# Altium PCB PCB.PcbDoc (part 2 of 2)
Units mil, origin at the board's own origin, x right, y up, seen from the top; angles counter-clockwise.
Board outline 2657.48 x 2755.91 mil, 2 copper layers (Top Layer, Bottom Layer), stack 62.2 mil thick; 84 components, 72 nets, 315 pads, 105 vias.
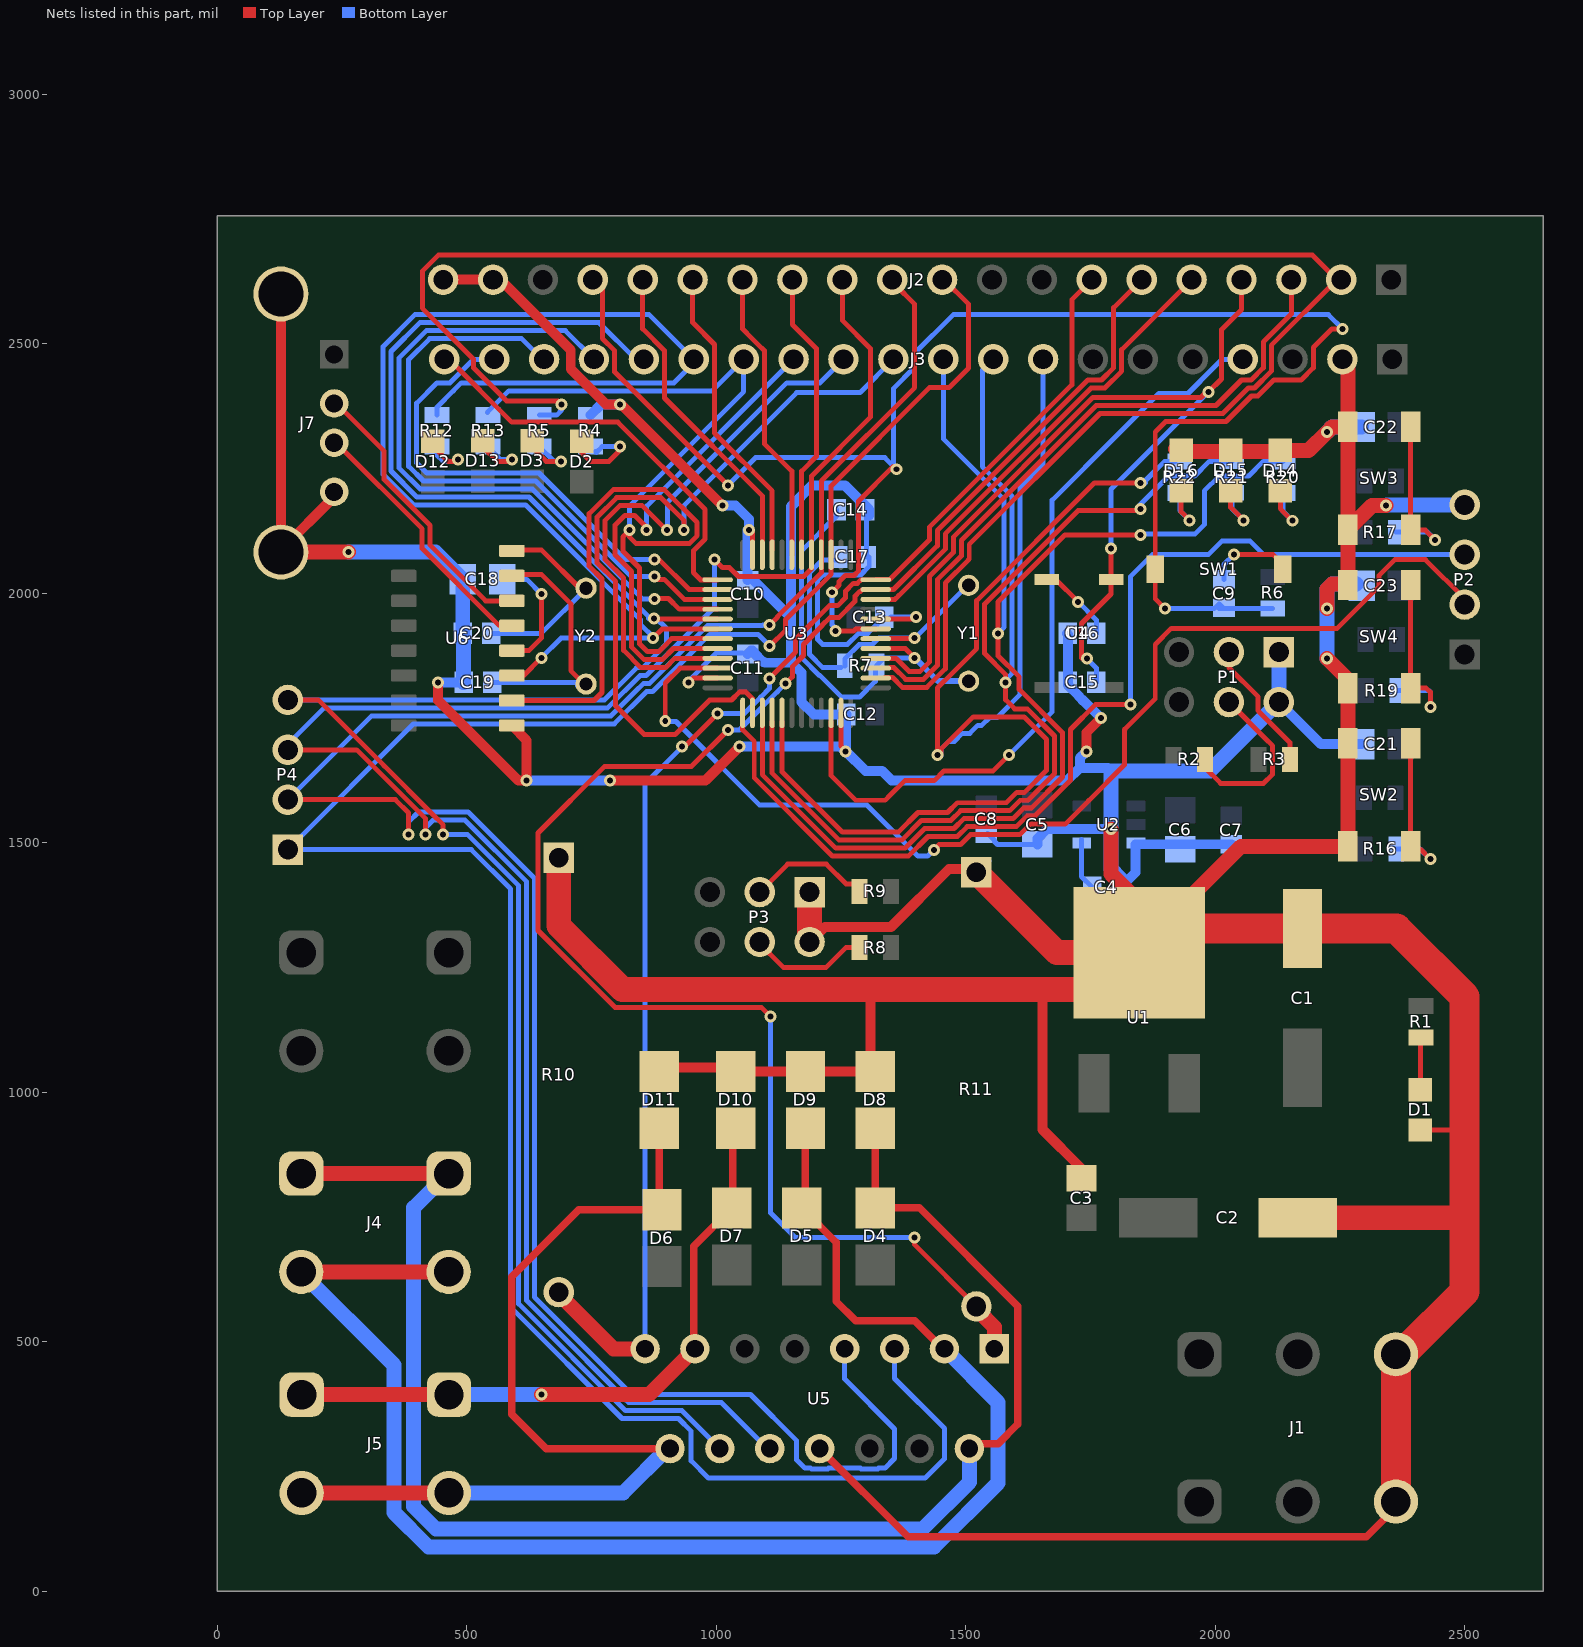
[diagram p2: the nets of this part, all layers, seen from the top]

## Via types
v1: diameter 24, hole 12, Top Layer to Bottom Layer, 104 vias
v2: diameter 50, hole 24, Top Layer to Bottom Layer, 1 vias

## Nets (pads, with @x,y where several pads share a name; then routed paths per layer and width w, separated by ;. In a path a pad name is that pad's centre, name@x,y a point inside that pad or via, vN(x,y) a via of type N, cw(c..) or ccw(c..) an arc to the next point about the centre after c; other vN are vias at no path point) (continued)
GND: C1.1 C2.1 C3.1 C4.1 C5.1 C6.1 C7.1 C8.1 C10.1 C11.1 C12.1 C13.1 C14.2 C15.2 C16.2 C17.2 C18.2 C19.2 C20.2 C21.1 C22.1 C23.1 D1.2 D8.2 D9.2 D10.2 D11.2 D14.2 D15.2 D16.2 J1.3 J2.19 J2.20 J3.2 J7.4 J7.5 J7.6 P1.1 P1.2 P2.4 P3.1 P3.2 R4.2 R10.1 R11.1 SW2.3 SW2.4 SW3.3 SW3.4 SW4.3 SW4.4 U1.4 U2.3 U3.8 U3.23 U3.35 U3.47 U5.8 U6.1 | length 16803
  Top Layer w10: J7.5@127.8,2599.24 J7.5@156.5,2627.95 ; v1(944.88,1820.87) 953.74,1829.72 U3.35@1002.95,1829.72 ; v1(1065.52,2125.98) 1072.83,2125.98 U3.23@1072.83,2076.77 ; U3.47@1250,1759.84 1250,1692.91 v1@1259.84,1683.07 ; U3.8@1319.88,1947.83 1396.65,1947.83 v1@1397.64,1948.82 ; D1.2@2411.38,923.85 2500,923.85 2508.5,923.85 2509.84,925.2
  Top Layer w15: U5.8@1207.48,285.43 1384.65,108.27 2303.15,108.27 2352.36,157.48 J1.3@2352.36,177.17
  Top Layer w20: J7.5@127.8,2599.24 127.8,2086.29 234.49,2192.98 J7.4@234.49,2202.79 J7.4@234.49,2207.16 ; v1(442.91,1820.87) 442.91,1784.45 603.35,1624.02 v1(620.08,1624.02) 620.08,1704.92 U6.1@590.55,1734.45 ; J2.20@452.76,2627.95 J2.19@552.76,2627.95 567.51,2627.95 680.61,2514.86 708.59,2486.88 708.59,2449.08 779.41,2378.26 v1(807.09,2378.26) 809.31,2378.26 v1(1012.37,2175.2) ; v1(786.81,1624.61) 979.05,1624.61 v1(1046.55,1692.11) ; D11.2@899.1,1049.21 D10.2@1032,1049.21 ; D10.2@1039.06,1041.34 1169.29,1041.34 1171.26,1043.31 1173.23,1041.34 D9.2@1178.98,1041.34 D8.2@1318.9,1041.34 ; P3.2@1187.2,1314.22 P3.2@1187.2,1300.65 1217.71,1331.16 1350.85,1331.16 1466.54,1446.85 R11.1@1509.92,1446.85 ; D8.2@1309.06,1061.02 1309.06,1200.79 ; 1653.54,1205.71 1653.54,925.2 C3.1@1732.28,846.46 ; v1(1742.08,1682.52) 1742.08,1720.43 v1(1771.09,1749.44)
  Top Layer w30: J7.6@127.8,2081.92 v1(263.03,2081.92) ; v1(1791.34,1526.91) 1791.34,1437.01 1847.68,1380.67 U1.4@1847.68,1279.39 ; U1.4@1887.92,1328.58 2051.63,1492.28 SW2.4@2265.75,1492.28 SW2.3@2265.75,1698.98 SW4.4@2265.75,1809.37 2265.75,1827.17 v1(2224.41,1868.5) ; D16.2@1920.87,2288.9 D16.2@1923.93,2285.84 ; D16.2@1927.81,2283.46 D15.2@2017.72,2283.46 ; D15.2@2027.56,2283.46 2125.51,2283.46 D14.2@2126.65,2284.6 ; D14.2@2130.51,2285.7 2187.27,2285.7 v1(2224.41,2322.83) 2234.25,2332.68 SW3.3@2253.94,2332.68 ; v1(2224.41,1968.61) 2224.41,2007.87 2234.25,2017.72 SW4.3@2265.75,2017.72 ; J3.2@2253.94,2480.32 2265.75,2468.5 SW3.4@2265.75,2126.46 ; SW4.3@2265.76,2016.07 SW3.4@2265.76,2126.46 ; v1(2342.52,2175.2) 2314.5,2175.2 SW3.4@2265.76,2126.46
  Top Layer w50: R10.1@684.55,1469.44 684.55,1333.17 812.01,1205.71 1653.54,1205.71 U1.4@1756.41,1205.71 ; P3.2@1187.2,1314.22 P3.1@1187.2,1400.65 ; R11.1@1521.41,1440.71 1682.73,1279.39 U1.4@1847.68,1279.39 ; C2.1@2165.35,748.03 2490.16,748.03 2500,757.87
  Top Layer w60: U1.4@1888.76,1327.74 C1.1@2175.2,1327.74 2363.21,1327.74 2500,1190.94 2500,923.85 2500,757.87 2500,600.39 J1.3@2376.97,477.36 ; J1.3@2362.2,179.13 J1.3@2362.2,472.44
  Bottom Layer w10: v1(944.88,1820.87) 944.88,1824.5 1000.3,1879.92 C11.1@1053.15,1879.92 ; C14.2@1298.23,2166.95 1301.17,2164.01 C17.2@1301.17,2072.24 ; C17.2@1306.77,2072.24 1306.77,2053.43 1289.28,2035.93 1213.68,2035.93 1203.26,2025.51 1203.26,1906.97 1213.57,1896.65 1262.97,1896.65 1285.43,1919.12 1303.98,1919.12 C13.1@1336.63,1951.77 ; C13.1@1347.28,1948.82 1350.23,1951.77 v1(1400.17,1951.77) ; R11.1@1543.88,1463.26 R11.1@1546.83,1463.26 ; C8.1@1544.13,1518.17 1557.83,1504.47 1557.83,1501.92 1563.69,1496.06 C5.1@1643.71,1496.06
  Bottom Layer w20: v1(442.91,1820.87) C19.2@494.09,1820.87 ; v1(620.08,1624.02) 620.67,1624.61 v1(786.81,1624.61) ; R4.2@748.03,2356.46 769.84,2378.26 v1(807.09,2378.26) ; v1(1012.37,2175.2) 1038.52,2175.2 1065.52,2148.2 v1(1065.52,2125.98) 1062.99,2125.98 C10.1@1062.99,2025.59 ; v1(1046.55,1692.11) 1249.65,1692.11 v1(1259.04,1682.72) 1259.84,1683.53 C12.1@1259.84,1751.97 ; C11.1@1062.99,1877.95 1070.05,1885.01 1072.83,1885.01 1075.28,1882.56 1075.28,1880.45 1094.03,1861.7 1096.14,1861.7 1097.59,1860.26 1146.31,1860.26 1148.85,1862.79 1171.26,1840.38 ; C10.1@1072.83,2027.56 1150.26,1950.13 ; 1150.26,1864.21 1150.26,1950.13 ; 1171.26,1838.38 1171.26,1781.17 1195.85,1756.57 C12.1@1260.84,1756.57 ; v1@1259.84,1683.07 1299.21,1643.7 1332.15,1643.7 1351.84,1624.02 1703.21,1624.02 1728.68,1649.49 ; C14.2@1306.77,2155.51 1306.77,2166.95 1257.84,2215.88 1192.26,2215.88 1150.26,2173.88 1150.26,1950.13 ; C5.1@1643.71,1496.06 1643.71,1507.59 1663.02,1526.91 v1(1791.34,1526.91) ; C16.2@1702.76,1919.29 1704.72,1917.32 C15.2@1704.72,1820.87 1704.72,1815.81 1727.11,1793.42 1727.11,1792.59 1736.48,1783.21 1737.32,1783.21 v1(1771.09,1749.44) ; v1(1742.08,1682.52) 1728.68,1669.13 1728.68,1649.49 ; 1791.34,1643.7 1791.34,1643.9 1785.74,1649.49 1728.68,1649.49 ; C4.1@1802.35,1418.49 C4.1@1810.75,1410.09 ; C4.1@1819.42,1418.77 1840.55,1439.89 1840.55,1496.06 1841.02,1496.53 C7.1@2032.6,1496.53 ; P1.2@2127.56,1781.5 2212.01,1697.05 C21.1@2292.98,1697.05
  Bottom Layer w30: v1(263.03,2081.92) 437.76,2081.92 C18.2@492.13,2027.56 ; C20.2@492.13,1919.29 C18.2@492.13,2017.72 ; C19.2@494.09,1820.87 C20.2@494.09,1909.45 ; C4.1@1811.02,1427.17 1791.34,1446.85 v1(1791.34,1526.91) 1791.34,1643.7 1989.76,1643.7 P1.2@2127.56,1781.5 2127.56,1868.5 P1.1@2125.98,1870.08 ; v1(2224.41,1868.5) v1(2224.41,1968.61) 2224.41,2007.87 2234.25,2017.72 C23.1@2283.46,2017.72 ; v1(2224.41,2322.83) 2234.25,2332.68 C22.1@2293.31,2332.68 ; v1(2342.52,2175.2) 2344.09,2176.77 P2.4@2500,2176.77
ISEN_A: J2.6 R11.2 U3.11 U5.1 | length 3513.2
  Top Layer w10: v1(1023.62,1725.66) 950.6,1652.63 776.65,1652.63 643.04,1519.02 643.04,1504.51 643.04,1434.37 643.04,1323.77 797.1,1169.71 1090.64,1169.71 v1(1108.78,1151.57) ; v1(1139.26,1818.65) 1152.69,1832.09 1152.69,1852.51 1175.02,1874.84 1175.02,1896.92 1211.84,1933.73 1211.84,1934.84 1227.66,1950.65 1245.8,1950.65 1278.37,1983.23 1278.37,1983.69 1278.37,1990.33 1278.37,1993.8 1287.83,2003.26 1289.53,2003.26 1293.16,2006.89 1296.63,2006.89 U3.11@1319.88,2006.89 1355.53,2006.89 1443.17,2094.53 1443.17,2125.24 1744.76,2426.83 1772.29,2426.83 1796.61,2451.15 1796.61,2571.81 J2.6@1852.76,2627.95 ; v1(1397.64,708.66) 1397.64,694.01 R11.2@1521.41,570.24
  Top Layer w30: R11.2@1525.59,570.87 1525.59,561.02 1557.48,529.13 U5.1@1557.48,485.43
  Bottom Layer w10: v1(1023.62,1725.66) 1046.26,1725.66 1063.04,1742.43 1063.1,1742.43 1122.65,1801.98 1122.65,1802.04 v1(1139.26,1818.65) ; v1(1108.78,1151.57) 1108.78,757.75 1157.86,708.66 v1(1397.64,708.66)
ISEN_B: J2.7 R10.2 U3.12 U5.15 | length 2807.6
  Top Layer w10: v1(931.71,1692.11) 932.51,1692.91 937.43,1692.91 v1(1002.95,1758.43) ; v1(1106.65,1828.26) 1107.28,1828.9 1107.28,1829.72 1159.02,1881.46 1159.02,1906.75 1226.82,1974.54 1243.37,1974.54 1259.18,1990.36 1259.18,2003.7 1274.74,2019.26 1282.91,2019.26 1290.22,2026.57 1319.88,2026.65 1347.52,2026.65 1427.17,2106.3 1427.17,2131.87 1712.6,2417.3 1712.6,2444.51 1712.61,2492.17 ; 1712.6,2492.18 1712.6,2587.8 J2.7@1752.76,2627.95
  Top Layer w30: R10.2@688.98,590.55 794.09,485.43 U5.15@857.48,485.43
  Bottom Layer w10: U5.15@857.48,485.43 857.48,1617.88 v1(931.71,1692.11) ; v1(1002.95,1758.43) 1056.47,1758.43 1089.2,1791.17 1106.65,1808.61 v1(1106.65,1828.26)
L298N_IN1: J2.10 P4.1 U3.15 U5.5 | length 4738.7
  Top Layer w10: v1(1107.28,1893.7) 1139.26,1925.68 1139.26,1946.8 1230.32,2037.86 U3.15@1230.32,2076.77 1230.32,2214.57 1427.17,2411.42 1466.54,2411.42 1505.91,2450.79 1505.91,2578.74 J2.10@1456.69,2627.95
  Bottom Layer w10: v1(1107.28,1893.7) 1083.68,1917.3 987.43,1917.3 948.51,1878.38 904.58,1834.45 872.62,1802.5 860.66,1802.5 795.95,1737.79 772.88,1737.79 772.47,1737.37 705.98,1737.37 705.56,1737.79 393.6,1737.79 P4.1@141.6,1485.79 509.3,1485.79 588.08,1407.01 588.08,568.85 811.23,345.7 817.44,345.7 924.59,345.7 949.91,320.38 949.91,260.72 984.25,226.38 1418.9,226.38 1457.48,264.96 1457.48,325.96 1357.48,425.96 U5.5@1357.48,485.43
L298N_IN2: J2.11 P4.2 U3.16 U5.7 | length 4564.5
  Top Layer w10: P4.2@141.6,1585.79 357,1585.79 383.71,1559.08 v1(383.71,1515.75) ; v1(1107.28,1936.12) 1123.26,1952.1 1123.26,1953.43 1210.63,2040.8 1210.63,2224.41 1397.64,2411.42 1397.64,2578.74 J2.11@1358.27,2618.11
  Bottom Layer w10: P4.2@141.6,1585.79 309.6,1753.79 712.19,1753.79 712.6,1753.37 765.84,1753.37 766.25,1753.79 789.33,1753.79 838.03,1802.5 854.03,1818.5 866,1818.5 982.85,1935.35 1092.66,1935.35 1093.43,1936.12 v1(1107.28,1936.12) ; v1(383.71,1515.75) 383.71,1541.45 403.54,1561.28 503.08,1561.28 636.08,1428.28 636.08,1401.76 636.08,588.73 831.11,393.7 1068.9,393.7 1161.42,301.18 1161.42,262.6 1177.95,246.06 1189.54,246.06 1190.69,244.91 1224.27,244.91 1225.42,246.06 1289.54,246.06 1290.69,244.91 1324.27,244.91 1325.42,246.06 1338.17,246.06 1357.48,265.38 1357.48,324.8 1257.48,424.8 U5.7@1257.48,485.43
L298N_IN3: J2.12 P4.3 U3.17 U5.10 | length 4011.1
  Top Layer w10: P4.3@141.6,1685.79 279.63,1685.79 417.71,1547.7 v1(417.71,1515.75) ; v1(996.62,2066.93) 1012.37,2051.18 1026.45,2051.18 1044.71,2032.93 1175.52,2032.93 1190.94,2048.35 U3.17@1190.94,2076.77 ; U3.17@1190.94,2096.86 1190.94,2234.25 1309.06,2352.36 1309.06,2490.16 1252.76,2546.46 J2.12@1252.76,2627.95
  Bottom Layer w10: P4.3@141.6,1685.79 141.6,1696.72 214.67,1769.79 718.82,1769.79 719.23,1769.37 759.21,1769.37 759.63,1769.79 782.7,1769.79 847.41,1834.5 857.75,1834.5 859.37,1834.5 891.32,1866.45 916.51,1891.64 996.62,1971.75 v1(996.62,2066.93) ; v1(417.71,1515.75) 417.71,1529.92 433.07,1545.28 496.45,1545.28 620.08,1421.65 620.08,1395.13 620.08,582.1 660.84,541.34 818.32,383.86 824.48,377.7 1010.32,377.7 1102.59,285.43 U5.10@1107.48,285.43
L298N_IN4: J3.16 P4.4 U3.29 U5.12 | length 4441.1
  Top Layer w10: P4.4@141.6,1785.79 202.26,1785.79 334.5,1653.54 429.39,1558.66 452.76,1535.29 v1(452.76,1515.75) ; v1(875.15,1949.1) 875.71,1949.1 876.97,1947.83 U3.29@1002.95,1947.83
  Bottom Layer w10: P4.4@141.6,1785.79 725.44,1785.79 725.86,1785.37 752.58,1785.37 753,1785.79 776.07,1785.79 840.78,1850.5 852.74,1850.5 884.7,1882.45 900.51,1898.27 900.51,1910.23 900.51,1929.13 880.55,1949.1 v1(875.15,1949.1) 864.15,1949.1 864.15,1953.21 624.95,2192.41 617.15,2192.41 400.13,2192.41 348.17,2244.37 348.17,2484.02 406.02,2541.86 485.55,2541.86 524.63,2541.84 765.23,2541.86 838.74,2468.35 J3.16@855.1,2468.35 ; v1(452.76,1515.75) 477.84,1515.75 501.97,1515.75 604.08,1413.64 604.08,586.87 604.08,575.48 817.85,361.7 829.24,361.7 840.48,361.7 931.21,361.7 U5.12@1007.48,285.43
LED1: J3.10 R20.1 U3.39 | length 2579.5
  Top Layer w10: U3.39@1092.52,1759.84 1092.52,1635.89 1239.76,1488.65 1378.4,1488.65 1417.77,1528.02 1476.77,1528.02 1496.46,1547.7 1594.88,1547.7 1615.88,1568.7 1631.44,1568.7 1694.12,1631.38 1694.12,1720.02 1607.17,1806.97 1607.17,1832.05 1564.96,1874.25 v1(1564.96,1919.29) 1564.96,1982.3 1698.8,2116.14 v1(1850.39,2116.14)
  Bottom Layer w10: J3.10@1455.1,2468.35 1455.1,2308.95 1577.23,2186.82 1577.23,2047.24 ; v1(1564.96,1919.29) 1577.23,1931.56 1577.23,2044.82 ; v1(1850.39,2116.14) 1852.92,2118.67 1937.64,2118.67 1960,2118.67 1967.32,2125.98 1978.35,2137.01 1978.35,2204.72 2007.87,2234.25 2066.93,2234.25 2096.46,2263.78 R20.1@2135.83,2263.78
LED2: J3.9 R21.1 U3.40 | length 2503.9
  Top Layer w10: U3.40@1112.2,1742.99 1112.2,1638.83 1246.39,1504.65 1371.72,1504.65 1411.09,1544.02 1470.14,1544.02 1489.83,1563.7 1588.26,1563.7 1609.25,1584.7 1624.81,1584.7 1678.12,1638.01 1678.12,1713.39 1623.54,1767.97 1598.17,1767.97 1580.17,1785.98 v1(1580.17,1820.87) 1580.17,1836.42 1537.96,1878.63 1537.96,1908.11 1537.96,1977.93 1725.38,2165.35 v1@1850.39,2165.35
  Bottom Layer w10: J3.9@1555.1,2468.35 1533.52,2446.77 1533.52,2253.15 1593.23,2193.44 1593.23,2186.3 1593.23,2126.65 1593.23,1839.29 1577.48,1823.55 v1(1580.17,1820.87) ; v1@1850.39,2165.35 1850.39,2178.2 1869.6,2197.41 1893.29,2221.09 1906.45,2234.25 1958.66,2234.25 1988.43,2264.02 R21.1@2033.31,2264.02
  other v1: 1850.39,2168.27
LED3: J3.8 R22.1 U3.41 | length 2844
  Top Layer w10: U3.41@1131.89,1742.13 1131.89,1641.77 1253.02,1520.65 1365.09,1520.65 1404.46,1560.02 1463.52,1560.02 1483.2,1579.7 1581.63,1579.7 1602.63,1600.7 1618.18,1600.7 1662.12,1644.63 1662.12,1706.77 1616.92,1751.97 1515.36,1751.97 1450.28,1686.88 1450.28,1675.7 v1(1443.28,1675.7) 1443.28,1809.65 1475.17,1841.54 1521.96,1888.34 1521.96,1984.56 1757.8,2220.4 v1@1854.41,2220.4
  Bottom Layer w10: v1(1443.28,1675.7) 1445.75,1673.23 1450.28,1673.23 1450.28,1686.88 1466.09,1702.7 1477.46,1702.7 1493.46,1718.7 1508.5,1718.7 1524.5,1734.7 1532.02,1734.7 1548.02,1750.7 1563.09,1750.7 1609.23,1796.84 1609.23,2189.98 1609.23,2212.61 1655.1,2258.48 J3.8@1655.1,2468.35 ; v1@1854.41,2220.4 1860.24,2220.4 1860.24,2225.32 1898.7,2263.78 R22.1@1919.29,2263.78
  other v1: 1850.39,2220.4
NetC4_2: C4.2 U2.4 | length 104.7
  Bottom Layer w10: U2.4@1732.28,1505.91 1732.28,1431.48 C4.2@1753.67,1410.09
NetC9_1: C9.1 SW1.1 | length 150
  Top Layer w10: v1(2037.4,2076.77) 2116.14,2076.77 SW1.1@2125.98,2066.93
  Bottom Layer w10: C9.1@2017.72,2027.56 2017.72,2057.09 v1(2037.4,2076.77)
NetC19_1: C19.1 U6.7 Y2.2 | length 480.2
  Top Layer w10: U6.7@610.24,2037.4 649.61,2037.4 708.66,1978.35 708.66,1844.27 Y2.2@739.01,1813.92
  Bottom Layer w10: C19.1@551.18,1820.87 718.16,1820.87 725.11,1813.92 Y2.2@721.64,1813.92
NetC20_1: C20.1 U6.8 Y2.1 | length 395.8
  Top Layer w10: U6.8@600.39,2086.61 649.61,2086.61 730.18,2006.04 Y2.1@739.01,2006.04
  Bottom Layer w10: C20.1@551.18,1919.29 649.61,1919.29 736.36,2006.04 Y2.1@739.01,2006.04
NetD1_1: D1.1 R1.2 | length 104.3
  Top Layer w10: D1.1@2411.42,1003.94 2411.42,1106.61 R1.2@2412.56,1107.75
NetD2_2: D2.2 R4.1 | length 178
  Top Layer w10: D2.2@730.53,2303.96 730.53,2281.28 748.03,2263.78 785.12,2263.78 807.09,2285.75 v1(807.09,2293.31)
  Bottom Layer w10: R4.1@757.87,2283.46 759.74,2281.6 771.45,2293.31 v1(807.09,2293.31)
NetD3_2: D3.2 R5.1 | length 138.3
  Top Layer w10: D3.2@631.16,2305.1 631.16,2292.07 659.45,2263.78 v1(688.98,2263.78)
  Bottom Layer w10: R5.1@645.51,2293.31 675.04,2263.78 v1(688.98,2263.78)
NetD12_2: D12.2 R12.1 | length 132.8
  Top Layer w10: D12.2@433.07,2293.31 462.6,2263.78 482.28,2263.78 v1(482.28,2267.41)
  Bottom Layer w10: R12.1@440.47,2293.31 440.47,2276.07 452.76,2263.78 482.28,2263.78 v1(482.28,2267.41)
NetD13_2: D13.2 R13.1 | length 132.6
  Top Layer w10: D13.2@531.79,2305.09 531.79,2293.01 561.02,2263.78 590.55,2263.78 v1(590.55,2267.41)
  Bottom Layer w10: R13.1@551.18,2283.46 567.24,2267.41 v1(590.55,2267.41)
NetD14_1: D14.1 R20.2 | length 133.4
  Top Layer w10: D14.1@2130.51,2204.7 2130.51,2168.91 v1(2154.58,2144.84)
  Bottom Layer w10: R20.2@2135.83,2200.63 2135.83,2163.59 v1(2154.58,2144.84)
NetD15_1: D15.1 R21.2 | length 135.5
  Top Layer w10: D15.1@2031.14,2205.34 2031.14,2171.61 v1(2057.09,2145.67)
  Bottom Layer w10: R21.2@2033.31,2200.87 2033.31,2169.45 v1(2057.09,2145.67)
NetD16_1: D16.1 R22.2 | length 123.4
  Top Layer w10: D16.1@1931.77,2204.66 1931.77,2162.71 v1(1948.82,2145.67)
  Bottom Layer w10: R22.2@1929.13,2194.88 1929.13,2165.35 v1(1948.82,2145.67)
NetJ7_2: J7.2 U6.6 | length 578
  Top Layer w10: J7.2@234.49,2384.32 334.65,2284.16 334.65,2227.35 426.8,2135.19 426.8,2095.82 538.18,1984.45 U6.6@590.55,1984.45
NetJ7_3: J7.3 U6.5 | length 540
  Top Layer w10: J7.3@234.49,2305.58 234.49,2293.31 246.06,2293.31 410.8,2128.57 410.8,2089.2 565.55,1934.45 U6.5@590.55,1934.45
NetP1_3: P1.3 R3.2 | length 265.7
  Top Layer w10: P1.3@2027.56,1881.5 2027.56,1850.39 2086.05,1791.91 2086.05,1764.3 2086.61,1763.73 2149.77,1700.58 R3.2@2149.77,1666.38
NetP1_4: P1.4 R2.1 | length 354
  Top Layer w10: R2.1@1979.66,1666.38 1979.66,1649.77 2010.95,1618.48 2096.98,1618.48 2115.3,1636.79 2115.3,1693.75 2113.52,1695.53 2113.52,1695.78 2107.08,1702.22 2106.83,1702.22 P1.4@2027.56,1781.5
NetP3_3: P3.3 R9.2 | length 247.6
  Top Layer w10: P3.3@1087.2,1400.65 1143.24,1456.69 1220.86,1456.69 1260.23,1417.32 1286.19,1417.32 R9.2@1292.59,1410.93
NetP3_4: P3.4 R8.1 | length 242.4
  Top Layer w10: P3.4@1082.68,1301.75 1134.43,1250 1220.47,1250 1259.84,1289.37 R8.1@1287.32,1289.37
NetR16_2: R16.2 SW2.1 SW2.2 | length 315.1
  Top Layer w10: SW2.2@2391.73,1492.28 SW2.1@2391.73,1692.91 ; SW2.2@2401.57,1486.22 2411.42,1486.22 v1(2431.1,1466.54)
  Bottom Layer w10: R16.2@2362.88,1487.09 2410.55,1487.09 v1(2431.1,1466.54)
NetR17_2: R17.2 SW3.1 SW3.2 | length 343
  Top Layer w10: SW3.1@2381.89,2332.68 2391.74,2322.82 SW3.2@2391.74,2126.46 ; SW3.2@2401.57,2125.98 2421.26,2125.98 v1(2440.94,2106.3)
  Bottom Layer w10: R17.2@2362.2,2121.89 2425.35,2121.89 v1(2440.94,2106.3)
NetR19_2: R19.2 SW4.1 SW4.2 | length 377.3
  Top Layer w10: SW4.1@2391.73,2017.72 SW4.2@2391.73,1809.37 2422.91,1809.37 2431.1,1801.18 v1(2431.1,1771.65)
  Bottom Layer w10: R19.2@2365.3,1804.49 2427.8,1804.49 2431.1,1801.18 v1(2431.1,1771.65)
OSCIN: C14.1 R7.1 U3.5 Y1.2 | length 843
  Top Layer w10: U3.5@1319.88,1888.78 1378.94,1888.78 v1(1397.64,1870.08)
  Bottom Layer w10: C14.1@1241.14,2166.95 1241.14,2154.4 1171.26,2084.52 1171.26,1958.83 1171.26,1871.64 1171.26,1870.08 1206.95,1834.39 1208.51,1834.39 1251.56,1791.34 1287.12,1791.34 1318.9,1823.12 R7.1@1318.9,1850.39 ; R7.1@1320.93,1854.17 1336.84,1870.08 v1(1397.64,1870.08)
  Bottom Layer w12: v1(1397.64,1870.08) 1444.49,1823.23 Y1.2@1505.91,1823.23
OSCOUT: C17.1 R7.2 U3.6 Y1.1 | length 705.9
  Top Layer w10: U3.6@1319.88,1908.46 1396.65,1908.46 v1(1397.64,1909.45)
  Bottom Layer w10: C17.1@1239.47,2066.1 1212.73,2066.1 1187.26,2040.64 1187.26,1965.46 1187.26,1876.71 1213.57,1850.39 R7.2@1250,1850.39 ; R7.2@1257.78,1854.17 1257.78,1868.02 1286.42,1896.65 1313.01,1896.65 1325.8,1909.45 v1(1397.64,1909.45) 1496.06,2007.87 1505.91,2007.87 Y1.1@1505.91,2015.35
OUT1: D4.2 D8.1 J4.1 U5.2 | length 3096.1
  Top Layer w15: D4.2@1318.9,767.72 1407.48,767.72 1604.33,570.87 1604.33,334.65 1564.96,295.28 U5.2@1515.75,295.28 ; D4.2@1318.9,777.56 D8.1@1318.9,927.17
  Top Layer w30: J4.1@168.62,836.45 J4.1@463.9,836.45
  Bottom Layer w30: J4.1@468.34,842.95 393.7,768.32 393.7,169.02 438.14,124.58 1413.95,124.58 1507.48,218.11 U5.2@1507.48,285.43
OUT2: D5.2 D9.1 J4.2 U5.3 | length 3072.2
  Top Layer w15: D5.2@1176.18,762.8 1240.16,698.82 1240.16,580.71 1279.53,541.34 1397.64,541.34 U5.3@1446.85,492.13 ; D9.1@1178.98,927.17 1178.98,769.84 D5.2@1181.1,767.72
  Top Layer w30: J4.2@168.62,639.6 J4.2@463.9,639.6
  Bottom Layer w30: J4.2@168.62,639.6 168.62,638.47 354.33,452.76 354.33,157.48 423.23,88.58 1437.01,88.58 1564.96,216.54 1564.96,377.95 U5.3@1457.48,485.43
OUT3: D7.2 D10.1 J5.1 U5.13 | length 1315.1
  Top Layer w15: U5.13@954.72,482.28 954.72,690.94 D7.2@1031.34,767.56 ; D7.2@1033.46,748.03 1033.46,921.57 D10.1@1039.06,927.17
  Top Layer w30: J5.1@169.29,393.7 J5.1@462.6,393.7 ; v1(649.61,393.37) 865.41,393.37 U5.13@957.48,485.43
  Bottom Layer w30: J5.1@472.44,393.7 472.78,393.37 v1(649.61,393.37)
OUT4: D6.2 D11.1 J5.2 U5.14 | length 1899.2
  Top Layer w15: D6.2@885.83,764.26 724.89,764.26 590.55,629.92 590.55,354.33 659.45,285.43 U5.14@907.48,285.43 ; D6.2@885.83,767.72 D11.1@885.83,927.17
  Top Layer w30: J5.2@169.29,196.85 J5.2@462.6,196.85
  Bottom Layer w30: J5.2@464.57,196.85 813.78,196.85 U5.14@902.36,285.43
PA0: J2.5 U3.10 | length 941.6
  Top Layer w10: U3.10@1319.88,1987.2 1358.47,1987.2 1365.84,1994.57 1459.17,2087.9 1459.17,2118.61 1751.39,2410.83 1778.92,2410.83 1812.61,2444.52 1812.61,2487.81 J2.5@1952.76,2627.95
PA9: J3.15 R12.2 U3.30 U6.3 | length 2653.9
  Top Layer w10: U6.3@590.55,1834.45 613.98,1834.45 v1(649.61,1870.08) ; v1(873.51,1909.45) 886.16,1922.1 886.34,1922.1 892.39,1928.15 U3.30@1002.95,1928.15
  Bottom Layer w10: R12.2@440.47,2356.46 440.47,2372.39 473.34,2405.26 489.34,2421.26 915.35,2421.26 954.72,2460.63 J3.15@954.72,2470.47 ; 492.17,2557.86 396.19,2557.86 332.17,2493.84 332.17,2237.74 393.5,2176.41 618.32,2176.41 848.15,1946.58 848.15,1937.28 v1@874.75,1910.68 ; 492.19,2557.84 518,2557.84 710.84,2557.86 865.59,2557.86 J3.15@955.1,2468.35 ; v1(649.61,1870.08) 688.98,1909.45 v1(873.51,1909.45)
PA10: J3.14 R13.2 U3.31 U6.2 | length 2423.8
  Top Layer w10: U6.2@590.55,1784.45 755.17,1784.45 771.27,1800.55 771.27,1804.06 771.48,1804.27 771.48,1830.99 771.27,1831.2 771.27,1996.19 771.48,1996.4 771.48,2023.12 771.27,2023.33 771.27,2027.96 745.56,2053.67 745.56,2158.92 793.83,2207.2 896.14,2207.2 962.04,2141.3 962.04,2114.8 946.22,2098.98 871.96,2098.98 839.65,2098.98 826.77,2111.86 v1(826.77,2125.98) 813.24,2112.46 813.24,2083.4 846.46,2050.19 846.46,1899.61 846.51,1899.55 846.51,1898.27 862.33,1882.45 884.7,1882.45 910.71,1908.46 U3.31@1002.95,1908.46
  Bottom Layer w10: R13.2@541.34,2362.2 584.39,2405.26 921.98,2405.26 992.01,2405.26 J3.14@1055.1,2468.35 1055.1,2403.52 826.77,2175.2 v1(826.77,2125.98)
PA11: J3.13 U3.32 | length 1004
  Top Layer w10: v1(860.77,2125.98) 856.3,2125.98 856.3,2135.83 836.61,2155.51 816.93,2155.51 797.24,2135.83 797.24,2076.77 830.46,2043.56 830.46,1892.98 830.51,1892.92 830.51,1891.64 855.7,1866.45 892.04,1866.45 914.37,1888.78 U3.32@1002.95,1888.78
  Bottom Layer w10: v1(860.77,2125.98) 860.77,2174.02 J3.13@1155.1,2468.35
PA12: J3.12 U3.33 | length 1171
  Top Layer w10: v1(901.04,2125.98) 851.83,2175.2 807.09,2175.2 777.56,2145.67 777.56,2066.93 814.46,2030.03 814.46,1886.35 814.51,1886.3 814.51,1885.01 849.07,1850.45 866.09,1850.45 885.88,1850.45 895.72,1850.45 898.67,1850.45 917.31,1869.09 U3.33@1002.95,1869.09
  Bottom Layer w10: v1(901.04,2125.98) 903.28,2128.22 902.5,2129 902.5,2135.83 902.5,2182.02 1141.73,2421.26 1208.01,2421.26 J3.12@1255.1,2468.35
PA15: J3.11 U3.38 | length 1579.9
  Top Layer w10: v1(935.04,2125.98) 935.04,2145.67 889.51,2191.2 800.46,2191.2 761.56,2152.3 761.56,2062.65 761.56,2060.3 798.46,2023.4 798.46,1773.66 855.74,1716.37 917.94,1716.37 987,1785.43 1030.63,1785.43 1046.55,1801.35 1059.74,1801.35 1072.83,1788.26 U3.38@1072.83,1759.84
  Bottom Layer w10: v1(935.04,2125.98) 935.04,2175.2 1161.42,2401.57 1288.33,2401.57 J3.11@1355.1,2468.35
PB0: J2.13 U3.18 | length 573.5
  Top Layer w10: J2.13@1152.76,2627.95 1152.76,2538.19 1200.79,2490.16 1200.79,2273.62 1171.26,2244.09 U3.18@1171.26,2086.61
PB1: J2.14 U3.19 | length 592.1
  Top Layer w10: J2.14@1052.76,2627.95 1052.76,2529.39 1072.29,2509.86 1092.52,2489.63 1096.61,2485.54 1096.61,2451.15 1096.61,2299.06 1151.57,2244.09 1151.57,2105.19 U3.19@1151.57,2076.77
PB9: J3.4 U3.46 | length 1568
  Top Layer w10: U3.46@1230.32,1742.13 1230.32,1633.86 1279.47,1584.7 1307.71,1584.7 1338.64,1584.7 1348.43,1594.49 1377.95,1624.02 1437.01,1624.02 1456.69,1643.7 1555.12,1643.7 v1(1587.12,1675.7)
  Bottom Layer w10: v1(1587.12,1675.7) 1673.23,1761.81 1673.23,2186.1 1803.1,2315.97 1887.1,2399.97 1945.43,2399.97 1996.61,2451.15 2013.8,2468.35 J3.4@2055.1,2468.35
PB10: J2.15 U3.21 | length 607.4
  Top Layer w10: J2.15@952.76,2627.95 952.76,2541.99 996.61,2498.14 996.61,2485.54 996.61,2451.15 996.61,2320.32 1112.2,2204.72 U3.21@1112.2,2086.61
PB11: J2.16 U3.22 | length 650.5
  Top Layer w10: J2.16@852.76,2627.95 852.76,2529.39 896.61,2485.54 896.61,2390.79 1092.52,2194.88 U3.22@1092.52,2076.77
PB12: J3.20 U3.25 | length 838.1
  Top Layer w10: J3.20@455.1,2468.35 464.72,2468.35 590.55,2342.52 802.94,2342.52 978.04,2167.42 978.04,2118.59 978.04,2108.17 954.72,2084.86 954.72,2040.62 968.77,2026.57 U3.25@1002.95,2026.57
PB13: J3.19 U3.26 | length 1019.8
  Top Layer w10: v1(875.98,2066.93) 885.83,2066.93 945.87,2006.89 U3.26@1002.95,2006.89
  Bottom Layer w10: J3.19@555.1,2468.35 513.8,2468.35 496.61,2451.15 466.72,2421.26 440.59,2421.26 399.86,2380.53 399.86,2321.37 399.86,2260.56 420.01,2240.41 643.45,2240.41 644.83,2240.41 818.31,2066.93 v1(875.98,2066.93)
PB14: J3.18 U3.27 | length 1246.1
  Top Layer w10: v1(875.98,2032.93) 875.98,2027.56 895.67,2027.56 936.02,1987.2 U3.27@1002.95,1987.2
  Bottom Layer w10: J3.18@649.61,2470.47 610.24,2509.84 572.31,2509.84 549.04,2509.86 537.9,2509.86 472.31,2509.84 425.88,2509.86 383.86,2467.84 383.86,2344.68 383.86,2253.94 413.39,2224.41 638.21,2224.41 829.69,2032.93 v1(875.98,2032.93)
PB15: J3.17 U3.28 | length 1414.4
  Top Layer w10: v1(875.98,1988.19) 876.95,1989.15 904.55,1989.15 926.18,1967.52 U3.28@1002.95,1967.52
  Bottom Layer w10: 478.92,2525.86 419.25,2525.86 364.17,2470.78 364.17,2250.99 406.76,2208.41 631.58,2208.41 851.8,1988.19 v1(875.98,1988.19) ; 478.93,2525.84 531.26,2525.84 578.92,2525.86 697.59,2525.86 J3.17@755.1,2468.35
PC13: J2.2 R5.2 U3.2 | length 3770.8
  Top Layer w10: 411.24,2645.12 411.24,2570.91 496.61,2485.54 513.59,2468.56 513.59,2451.15 537.9,2426.83 579.74,2385 683.44,2385 v1(690.18,2378.26) ; 411.24,2645.15 443.26,2677.17 648.39,2677.17 2194.88,2677.17 2244.09,2627.95 2112.61,2496.47 2112.61,2444.52 2078.92,2410.83 2066.35,2410.83 2015.24,2359.73 1769.18,2359.73 1507.17,2097.72 1507.17,2068.02 1505.91,2066.76 1459.17,2020.02 1459.17,1848.17 1422.08,1811.08 1373.2,1811.08 1353.57,1830.71 U3.2@1338.58,1830.71
  Bottom Layer w10: R5.2@645.51,2356.46 680.19,2356.46 690.18,2366.45 v1(690.18,2378.26)
PC14: J2.3 U3.3 | length 1335.1
  Top Layer w10: U3.3@1348.43,1850.39 1356.51,1850.39 1379.83,1827.08 1415.45,1827.08 1437.01,1848.64 1443.17,1854.8 1443.17,2026.65 1490.87,2074.35 1491.17,2074.65 1491.17,2105.36 1761.54,2375.73 2001.72,2375.73 2052.82,2426.83 2072.29,2426.83 2096.61,2451.15 2096.61,2500.15 2096.61,2503.09 2152.76,2559.24 J2.3@2152.76,2627.95
PC15: C15.1 J2.4 U3.4 U4.4 | length 1985.2
  Top Layer w10: U3.4@1319.88,1869.09 1360.44,1869.09 1386.45,1843.08 1408.82,1843.08 1427.17,1861.42 1427.17,2033.27 1475.17,2081.27 1475.17,2111.99 1754.91,2391.73 1971.45,2391.73 1982.45,2402.73 v1(1986.37,2402.73) 2012.61,2428.97 2012.61,2527.74 2052.76,2567.88 J2.4@2052.76,2627.95 ; v1(1743.11,1868.5) 1733.86,1868.5 1732.28,1870.08 1732.28,1938.98 1791.34,1998.03 U4.4@1791.34,2027.56 v1(1791.34,2089.14)
  Bottom Layer w10: v1(1743.11,1868.5) 1761.81,1849.8 C15.1@1761.81,1820.87 ; v1(1791.34,2089.14) 1791.34,2207.7 v1(1986.37,2402.73)
PC16: C16.1 U4.1 | length 159.9
  Top Layer w10: U4.1@1662.34,2027.56 1680.13,2027.56 v1(1725.38,1982.3)
  Bottom Layer w10: v1(1725.38,1982.3) 1761.81,1945.88 C16.1@1761.81,1919.29
RESET: C9.2 J2.17 R6.2 SW1.2 U3.7 | length 3613.8
  Top Layer w10: J2.17@752.76,2627.95 772.29,2608.42 772.29,2509.86 796.61,2485.54 796.61,2442.9 v1(1023.62,2215.88) ; v1(1232.18,2001.54) 1232.18,2006.87 1237.62,2006.87 1242.63,2011.88 1242.63,2012 1246.32,2015.68 1246.32,2022.89 1258.68,2035.26 1276.28,2035.26 1285.61,2044.59 1285.61,2079.91 1285.68,2079.99 1285.68,2184.53 1355.1,2253.94 v1(1361.01,2248.02) ; v1(1238.84,1923.65) 1275.26,1923.65 1279.76,1928.15 U3.7@1319.88,1928.15 ; v1(1899.61,1968.5) 1879.92,1988.19 SW1.2@1879.92,2047.24 1879.92,2322.83 1900.82,2343.73 2021.87,2343.73 2072.97,2394.83 2085.55,2394.83 2117.55,2426.83 2172.29,2426.83 2196.61,2451.15 2196.61,2491.88 2234.25,2529.53 v1(2255.1,2529.53)
  Bottom Layer w10: v1(1023.62,2215.88) 1078.83,2271.09 1337.94,2271.09 v1@1355.1,2253.94 ; v1(1232.18,2001.54) 1232.18,1936.12 1242.23,1926.07 1242.23,1923.65 v1(1238.84,1923.65) ; v1(1361.01,2248.02) v1@1355.1,2253.94 ; v1(1899.61,1968.5) 1998.03,1968.5 2007.87,1978.35 C9.2@2017.72,1968.5 ; C9.2@2007.87,1968.5 2007.98,1968.61 R6.2@2115.31,1968.61 ; v1(2255.1,2529.53) 2226.77,2557.86 1821.98,2557.86 1475.18,2557.86 1396.61,2479.29 1396.61,2451.15 1355.1,2409.64 v1@1355.1,2253.94
SWCLK: P2.3 U3.37 | length 2111.1
  Top Layer w10: U3.37@1053.15,1759.84 1053.15,1725.92 1076.31,1702.76 1076.31,1629.47 1233.14,1472.65 1385.02,1472.65 1424.39,1512.02 1483.4,1512.02 1503.08,1531.7 1601.51,1531.7 1622.51,1552.7 1638.07,1552.7 1710.12,1624.75 1710.12,1726.65 1760.43,1776.96 v1(1830.71,1776.96)
  Bottom Layer w10: v1(1830.71,1776.96) 1830.71,2033.39 1874.09,2076.77 1986.22,2076.77 2013.22,2103.77 2048.59,2103.77 2070.05,2103.77 2097.05,2076.77 P2.3@2500,2076.77
SWIO: P2.2 U3.34 | length 2317.9
  Top Layer w10: v1(897.95,1743.37) 897.95,1819.53 927.83,1849.41 U3.34@1002.95,1849.41 ; v1(1437.01,1485.02) 1437.01,1486.22 1446.8,1496.02 1490.03,1496.02 1509.71,1515.7 1608.14,1515.7 1629.14,1536.7 1699.33,1536.7 1746.59,1583.96 1818.4,1655.77 1818.4,1726.47 1823.05,1731.12 1857.71,1765.78 1879.92,1787.99 1879.92,1896.95 1912.11,1929.13 2244.57,1929.13 2289.99,1974.55 2328.74,2013.3 2328.74,2035.49 2360.18,2066.93 2421.26,2066.93 2500,1988.19 P2.2@2500,1976.77
  Bottom Layer w10: v1(897.95,1743.37) 897.95,1742.43 919.57,1742.43 1087.2,1574.8 1121.88,1574.8 1302.16,1574.8 1404.31,1472.65 1423.43,1472.65 1436.41,1485.62 v1(1437.01,1485.02)
V3: C18.1 U6.4 | length 249
  Top Layer w10: U6.4@590.55,1884.45 624.61,1884.45 649.61,1909.45 v1(649.61,1998.03)
  Bottom Layer w10: C18.1@570.87,2027.56 620.08,2027.56 v1(649.61,1998.03)
pads on no net: J2.1 J7.1 U4.2 U4.3 U6.9 U6.10 U6.11 U6.12 U6.13 U6.14 U6.15

## Polygon pours and split planes (outlines as drawn)
GND on Top Layer "GND_L01_P002" (solid, remove dead copper, pour order 2): 1521.41,1515.7 1581.73,1576.03 2171.67,1576.03 2171.67,972.99 2175.2,969.47 2174.23,968.5 1521.41,968.5
GND on Bottom Layer "GND_L02_P005" (solid, remove dead copper, pour order 5): 1541.18,1575.25 1544.12,1572.32 2168.07,1572.32 2168.07,967.28 2165.35,964.57 1515.75,964.57 1515.75,1571.47 1519.53,1575.25

## Keep-outs
Keep-Out Layer:
  lines w10: 1395.67,3071.07 1401.25,3074.21 ; 0,0 0,2755.91 2657.48,2755.91 2657.48,0 0,0

## Other copper
Top Layer:
  pour cut-out: 729.38,1605.36 787.58,1605.36 798.46,1594.49 767.57,1563.61 767.57,1469.44 526.21,1469.44 565.66,1508.89 565.66,1608.94

## Silkscreen, mask and mechanical layers (free items; w line width, h text height)
Top Overlay:
  text "ISENB-A" at 1739.28,2704.01 h20
  text "GND" at 405.25,2701.1 h30
  text "GND" at 511.97,2701.1 h30
  text "3V3" at 620.24,2701.1 h30
  text "RST" at 728.5,2701.1 h30
  text "B11" at 826.93,2701.1 h30
  text "B10" at 915.51,2701.1 h30
  text "B1" at 1033.62,2701.1 h30
  text "B0" at 1122.2,2701.1 h30
  text "IN3" at 1210.79,2701.1 h30
  text "IN2" at 1319.06,2701.1 h30
  text "IN1" at 1427.32,2701.1 h30
  text "A0" at 1929.29,2697.01 h30
  text "C15" at 2008.03,2697.01 h30
  text "C14" at 2116.3,2697.01 h30
  text "C13" at 2224.57,2697.01 h30
  text "encoderB-A" at 1510.91,2696.1 h20
  text "Button1-2-3" at 1702.91,2372.2 h25
  text "B9" at 2027.72,2372.2 h30
  text "5V" at 2126.14,2372.2 h30
  text "GND" at 2214.72,2372.2 h30
  text "3.3V" at 2315.1,2372.2 h30
  text "A10" at 1013.94,2362.52 h30
  text "A11" at 1122.2,2362.52 h30
  text "A12" at 1220.63,2362.52 h30
  text "A15" at 1319.06,2362.52 h30
  text "led1-2-3" at 1437.17,2362.52 h30
  text "B12" at 405.25,2362.36 h30
  text "B13" at 501.44,2362.36 h30
  text "B14" at 620.24,2362.36 h30
  text "B15" at 718.66,2362.36 h30
  text "IN4" at 817.09,2362.36 h30
  text "A9" at 925.35,2362.36 h30
  text "led3" at 1840.71,2322.99 h30
  text "led2" at 1968.66,2322.99 h30
  text "led1" at 2095.61,2322.99 h30
  text "button3" at 2490,2254.09 h30 r90
  text "GND" at 2598.27,2214.72 h30 r90
  text "SWCLK" at 2598.27,2027.72 h30 r90
  text "boot1" at 1968.66,1939.13 h30
  text "0" at 2204.88,1909.61 h30
  text "1" at 1830.87,1899.76 h30
  text "SWIO" at 2598.27,1899.76 h30 r90
  text "IN4" at 39.53,1830.55 h30 r270
  text "3.3" at 2598.27,1781.65 h30 r90
  text "IN3" at 39.53,1732.13 h30 r270
  text "1" at 1830.87,1722.6 h30
  text "0" at 2204.88,1712.76 h30
  text "IN2" at 39.53,1623.86 h30 r270
  text "Button2" at 2480.16,1604.49 h30 r90
  text "boot0" at 2047.09,1574.96 h30 r90
  text "IN1" at 39.53,1525.43 h30 r270
  text "1" at 974.57,1476.54 h30
  text "ENB" at 1043.46,1476.54 h30
  text "0" at 1191.1,1476.54 h30
  text "encoderA" at 49.37,1427.01 h30 r270
  text "Button1" at 2480.16,1387.95 h30 r90
  text "1" at 964.72,1200.94 h30
  text "ENA" at 1043.46,1200.94 h30
  text "0" at 1181.26,1200.94 h30
  text "encoderB" at 49.37,1151.42 h30 r270
  text "OUT1" at 49.37,875.83 h30 r270
  text "OUT2" at 49.37,698.66 h30 r270
  text "OUT3" at 49.37,442.76 h30 r270
  text "OUT4" at 49.37,236.06 h30 r270
  text "12V" at 1934.21,59.21 h30
  text "5V" at 2144.04,59.21 h30
  text "GND" at 2327.91,59.21 h30

## Text inside footprints (layer, text, board x,y; h text height)
U4: Top Overlay "*" at 1624.02,2081.79 h50